# Altium PCB E73-2G4M04S_breakout_pcb.PcbDoc
Units mm, origin at the board's own origin, x right, y up, seen from the top; angles counter-clockwise.
Board outline 46.99 x 44.96 mm, 2 copper layers (Top Layer, Bottom Layer); 16 components, 40 nets, 138 pads, 11 vias.
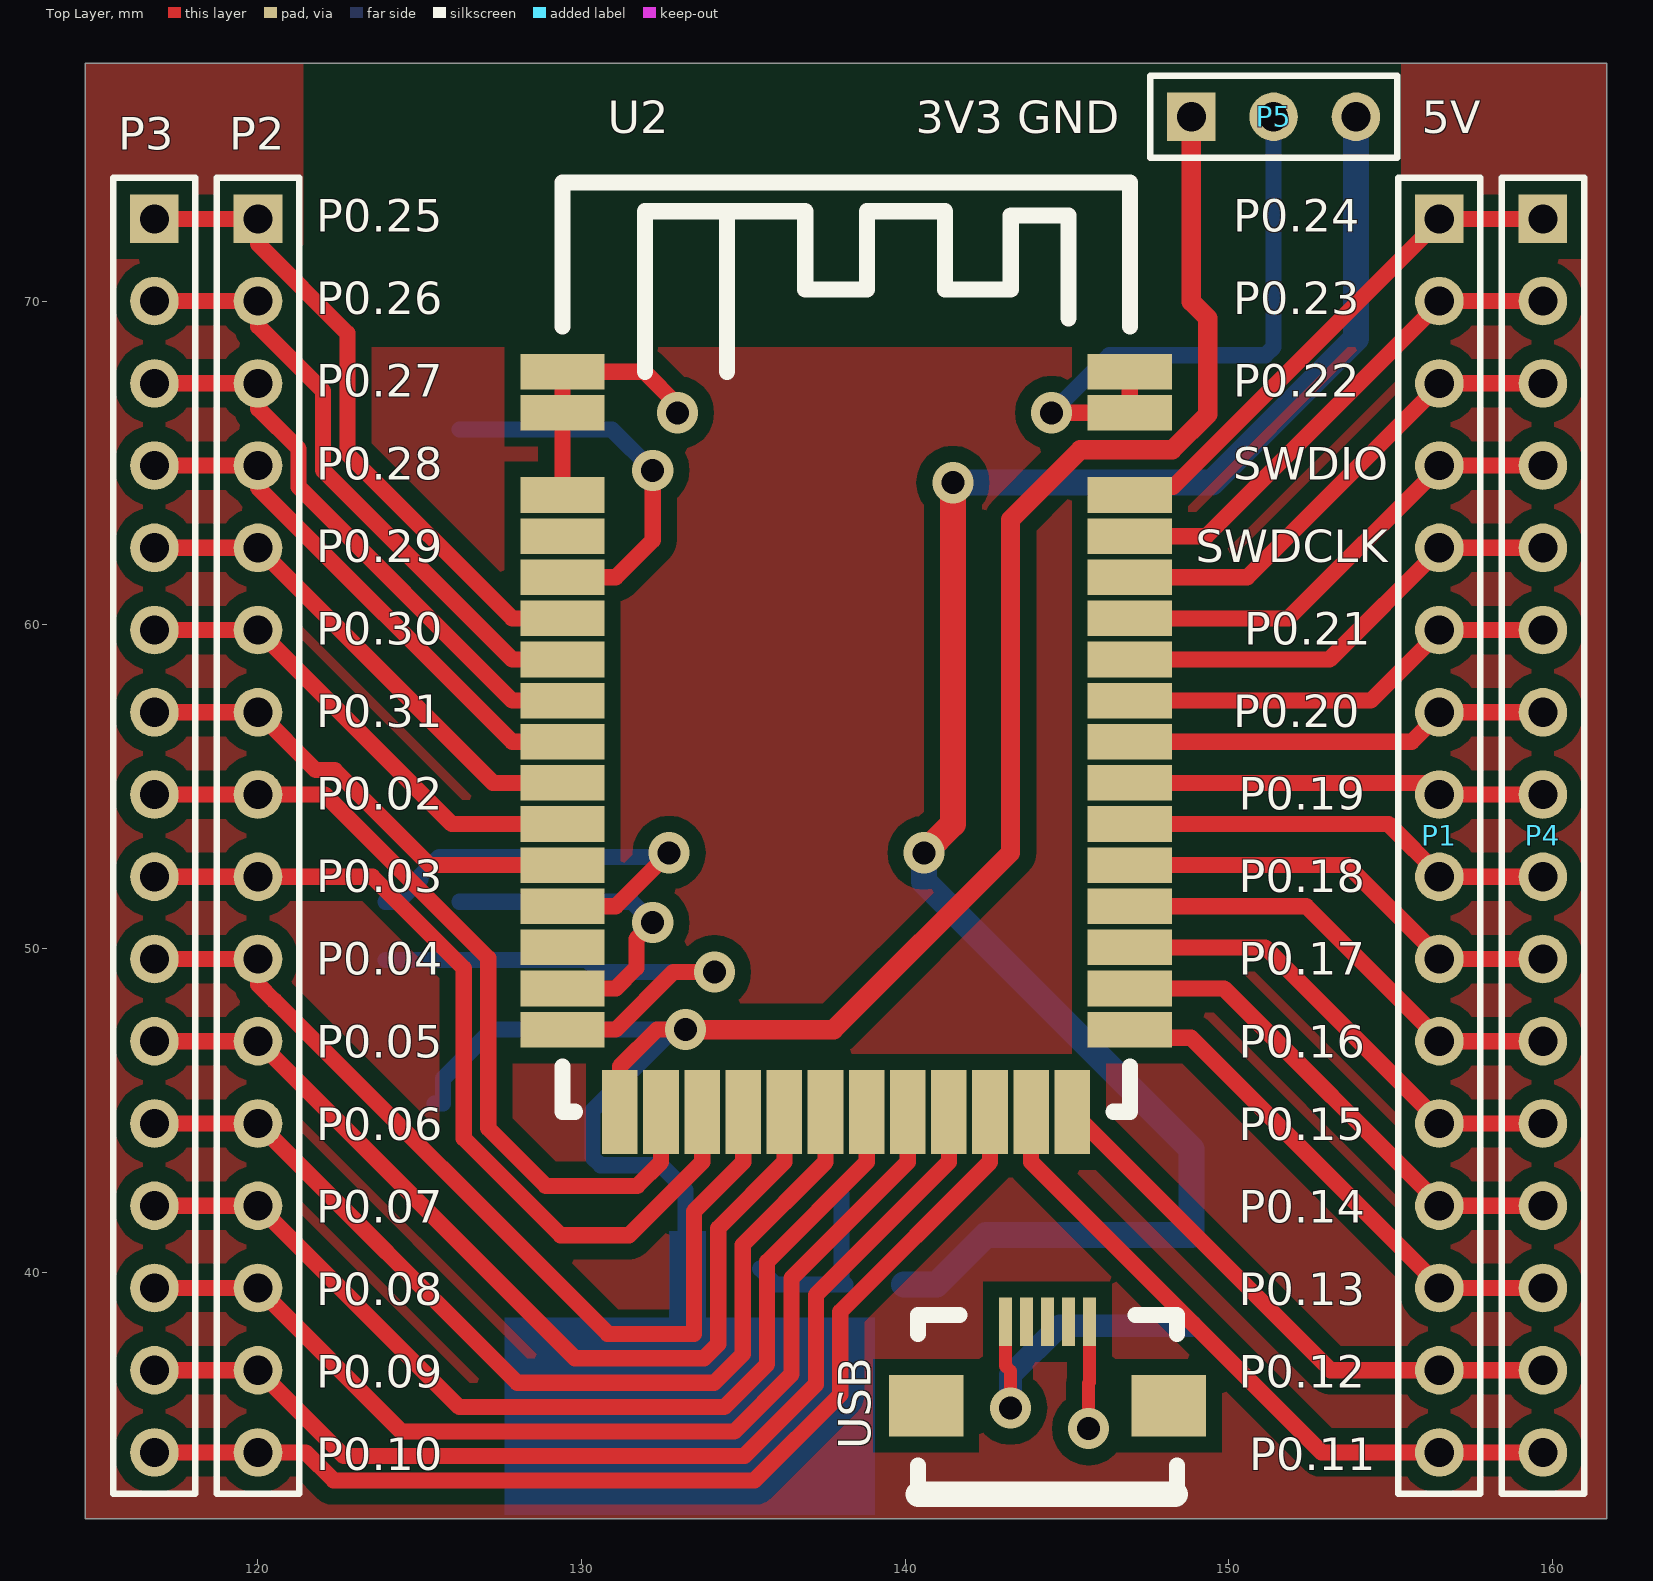
[diagram p0: Top Layer view]
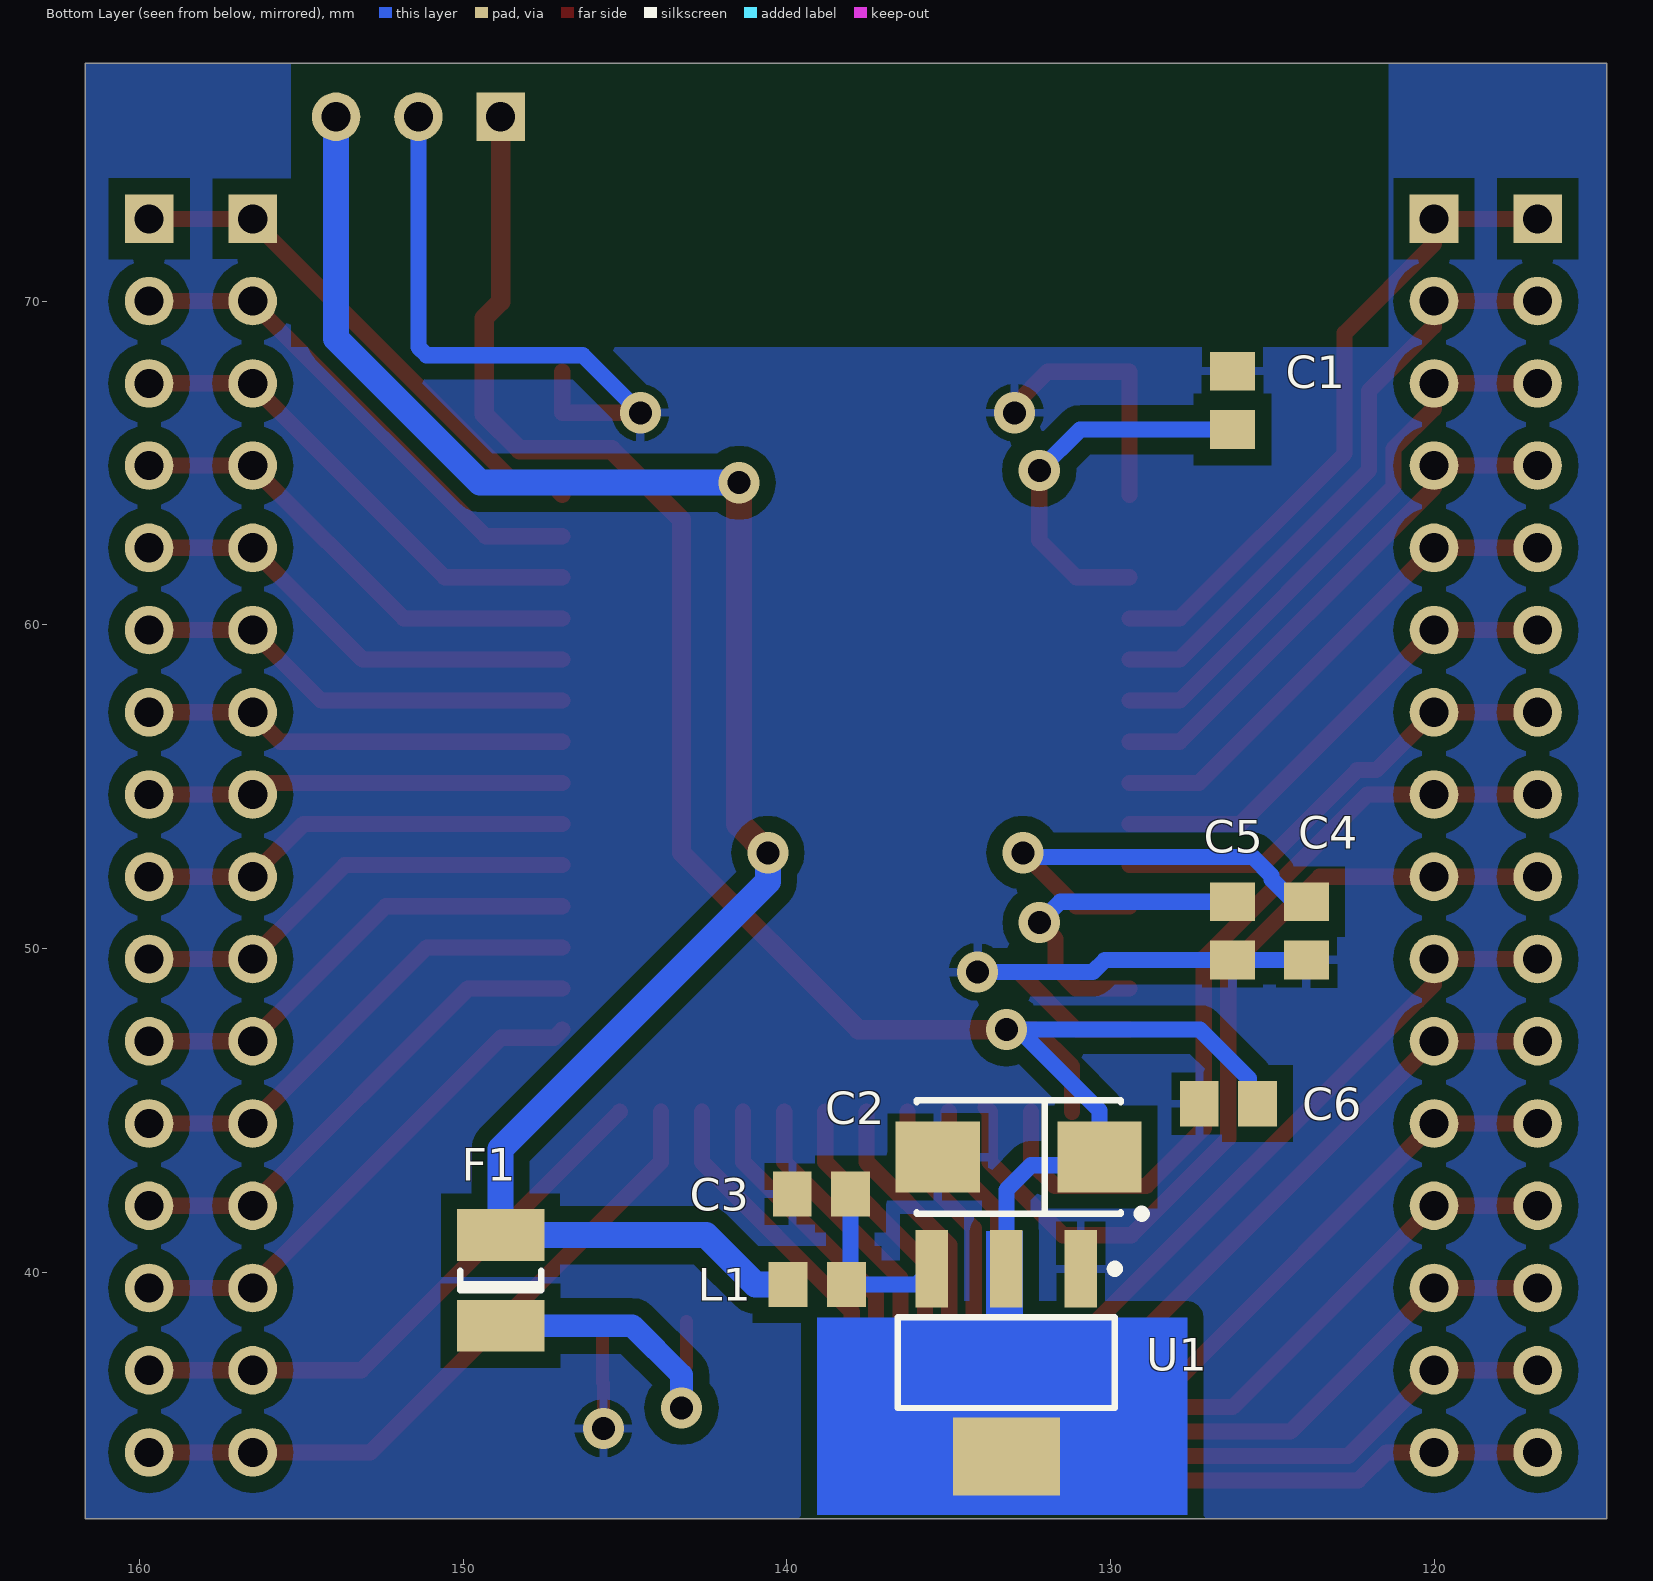
[diagram p1: Bottom Layer view, seen from below]

## Layer stack, top to bottom
Top Solder: solder mask 0.0102, Solder Resist, Dk 3.5
Top Layer: signal copper 0.0356
Dielectric 1: dielectric 0.32, FR-4, Dk 4.8
Bottom Layer: signal copper 0.0356
Bottom Solder: solder mask 0.0102, Solder Resist, Dk 3.5

## Board outline
114.681,32.385 114.681,77.343 161.671,77.343 161.671,32.385

## Design rules (kind name [scope] priority, off if disabled: settings)
Clearance "Poly Clearance" [InPolygon] p1: gap=0.5
Clearance [All] p2: gap=0.127
PolygonConnect [All] p1: connectstyle=Relief reliefconductorwidth=0.254 reliefentries=4 polygonreliefangle="90 Angle" airgapwidth=0.254
RoutingVias [All] p1: holewidth=0.711 width=1.27 viastyle="Through Hole" minholewidth=0.711 minwidth=1.27 maxholewidth=0.711 maxwidth=1.27
SilkToSolderMaskClearance [IsPad] p1: minsilkscreentomaskgap=0.127 clearancetoexposedcopper=TRUE
SolderMaskExpansion [All] p1: expansion=0.102
Width [All] p1: maxlimit=1 minlimit=0.254 preferedwidth=0.5 minimp=50.000000 maximp=50.000000 favimp=50.000000
29 further rules are at their usual default settings.

## Classes and differential pairs
component class E73-2G4M04S_breakout_sch: C1 C2 C3 C4 C5 C6 F1 L1 P1 P2 P3 P4 U1 U2 USB

## Components (designator, comment, footprint, x,y, rotation, side; value= is the part's Value field where it differs from the comment)
C1 "Cap" 6-0805_N 126.238,66.929 r270 bottom
C2 "TCSCN1C106KCAR" C 132.842,43.561 r0 bottom
C3 "Cap" 6-0805_N 138.938,42.418 r180 bottom
C4 "Cap" 6-0805_N 123.952,50.546 r270 bottom
C5 "Cap" 6-0805_N 126.238,50.546 r270 bottom
C6 "Cap" 6-0805_N 126.365,45.212 r0 bottom
F1 "PTC Fuse" 1210 148.844,39.751 r90 bottom
L1 "Ferrite" 6-0805_n 139.065,39.624 r180 bottom
P1 "Header 16" HDR1X16 156.5,72.538 r270 top
P2 "Header 16" HDR1X16 120.015,72.538 r270 top
P3 "Header 16" HDR1X16 116.815,72.538 r270 top
P4 "Header 16" HDR1X16 159.7,72.538 r270 top
P5 "Header 3" HDR1X3 148.844,75.692 r0 top
U1 "LM1117MPX-3.3" MP04A_N 133.223,37.211 r270 bottom
U2 "E73-2G4M04S" E73-2G4M04S 129.424,44.958 r0 top
USB "Micro-B" USB_2_MICRO_B 144.399,38.481 r180 top

## Footprints (in the part's own frame and the unit in brackets; to place one, negate y for a bottom-side part, rotate by r counter-clockwise, add the part's x,y. Pads: shape width x height; smd on the part's side, far side on the other; paste and mask are expansions set on the pad)
6-0805_N [mm] "Chip Resistor, Body 2.0x1.2mm, IPC Medium Density"
  rect 1.2x1.4 smd: 1(-0.9,0) 2(0.9,0)
  body extent -1.07,-0.7 1.07,0.7, height 0.7
6-0805_n [mm] "Chip Resistor, Body 2.0x1.2mm, IPC Medium Density"
  rect 1.2x1.4 smd: 1(-0.9,0) 2(0.9,0)
  body extent -1.07,-0.7 1.07,0.7, height 0.7
1210 [mm] "Chip Capacitor; Body 3.2 x 2.5 mm (LxW typ)"
  rect 1.6x2.7 smd: 1(-1.4,0) 2(1.4,0)
  silkscreen extent -0.3,-1.25 0.3,1.25
C [mm] "Capacitor, SM Tantalum; Body 6.0 x 3.2 mm (LxW typ)"
  rect 2.6x2.2 smd: 1(-2.5,0) 2(2.5,0)
  silkscreen extent -3.92,-1.75 3.15,1.87
E73-2G4M04S [mm] "nRF52832 2.4GHz Transceiver Wireless RF module"
  rect 2.6x1.1 smd: 0(-0.008,22.86) 1(-0.008,21.59) 2(-0.008,19.05) 3(-0.008,17.78) 4(-0.008,16.51) 5(-0.008,15.24) 6(-0.008,13.97) 7(-0.008,12.7) 8(-0.008,11.43) 9(-0.008,10.16) 10(-0.008,8.89) 11(-0.008,7.62) 12(-0.008,6.35) 13(-0.008,5.08) 14(-0.008,3.81) 15(-0.008,2.54) 28(17.518,2.54) 29(17.518,3.81) 30(17.518,5.08) 31(17.518,6.35) 32(17.518,7.62) 33(17.518,8.89) 34(17.518,10.16) 35(17.518,11.43) 36(17.518,12.7) 37(17.518,13.97) 38(17.518,15.24) 39(17.518,16.51) 40(17.518,17.78) 41(17.518,19.05) 42(17.518,21.59) 43(17.518,22.86)
  rect 1.1x2.6 smd: 16(1.77,0) 17(3.04,0) 18(4.31,0) 19(5.58,0) 20(6.85,0) 21(8.12,0) 22(9.39,0) 23(10.66,0) 24(11.93,0) 25(13.2,0) 26(14.47,0) 27(15.74,0)
  silkscreen extent 0,0 17.53,28.7
HDR1X3 [mm] "Connector; Header; 3 Position"
  rect 1.5x1.5 hole 0.9: 1(0,0)
  round 1.5 hole 0.9: 2(2.54,0) 3(5.08,0)
  silkscreen extent -1.27,-1.27 6.35,1.27
HDR1X16 [mm] "Connector; Header; 16 Position"
  rect 1.5x1.5 hole 0.9: 1(0,0)
  round 1.5 hole 0.9: 2(2.54,0) 3(5.08,0) 4(7.62,0) 5(10.16,0) 6(12.7,0) 7(15.24,0) 8(17.78,0) 9(20.32,0) 10(22.86,0) 11(25.4,0) 12(27.94,0) 13(30.48,0) 14(33.02,0) 15(35.56,0) 16(38.1,0)
  silkscreen extent -1.27,-1.27 39.37,1.27
MP04A_N [mm] "SOT223, 4-Leads, Body 6.5x3.5mm, Pitch 2.3mm, Lead Span 7mm, IPC Medium Density"
  rect 2.4x1 smd: 1(-2.9,2.3) 2(-2.9,0) 3(-2.9,-2.3)
  rect 2.4x3.3 smd: 4(2.9,0)
  silkscreen extent -3.02,-3.35 1.4,3.47, body extent -1.86,-3.35 1.86,3.35, height 1.8
USB_2_MICRO_B [mm] "Generic usb Micro-B connector footprint"
  rect 0.4x1.5 smd: 1(1.3,0) 2(0.65,0) 3(0,0) 4(-0.65,0) 5(-1.3,0)
  rect 2.3x1.9 smd: 6(-3.75,2.6) 7(3.75,2.6)
  silkscreen extent -4,-0.2 4,5.35

## Part data
C1 C3 C4 C5 C6: "Capacitor"
C2: library part "Cap Pol3", "Polarized Capacitor (Surface Mount)"
F1: library part "Fuse 1", "Fuse"
L1: library part Inductor, "Inductor"
P1 P2 P3 P4: "Header, 16-Pin"
P5: "Header, 3-Pin"
U1: "800mA Low-Dropout Linear Regulator, 4-pin SOT-223"
U2: "nRF52832 2.4GHz Transceiver Wireless rf Module"
USB: library part USB_MICRO_B, "Generic USB Micro-B connector SMT"

## Via types
v1: diameter 1.27, hole 0.711, Top Layer to Bottom Layer, 11 vias

## Nets (pads, with @x,y where several pads share a name; then routed paths per layer and width w, separated by ;. In a path a pad name is that pad's centre, name@x,y a point inside that pad or via, vN(x,y) a via of type N, cw(c..) or ccw(c..) an arc to the next point about the centre after c; other vN are vias at no path point)
3V3: C2.1 C6.1 P5.1 U1.2 U1.4 U2.16 | length 62.2
  Top Layer w0.5: U2.16 131.194,46.358 132.334,47.498 v1(133.223,47.498)
  Top Layer w0.6: v1(133.223,47.498) 137.795,47.498 143.256,52.959 143.256,63.246 145.415,65.405 148.253,65.405 149.352,66.504 149.352,69.469 148.844,69.977 P5.1
  Bottom Layer w0.5: C6.1 125.73,45.212 125.73,45.985 127.243,47.498 v1@132.588,47.498 ; 132.588,47.244 130.342,44.998 C2.1 130.596,43.307 132.461,43.307 133.223,42.545 U1.2
5V: F1.2 L1.1 P5.3 | length 57.7
  Top Layer w0.8: v1(140.589,52.959) 141.478,53.848 v1(141.478,64.389)
  Bottom Layer w0.8: L1.1 140.97,39.624 142.497,41.151 F1.2 148.844,43.815 140.589,52.07 v1(140.589,52.959) ; v1(141.478,64.389) 149.479,64.389 153.924,68.834 P5.3
GND: C1.1 C2.2 C3.1 C4.2 C5.2 C6.2 P5.2 U1.1 U2.0 U2.1 U2.2 U2.15 U2.42 U2.43 USB.5 | length 45.6
  Top Layer w0.4: v1(145.669,35.179) 145.669,36.576 145.699,36.606 USB.5
  Top Layer w0.5: U2.15 131.064,47.498 132.842,49.276 v1(134.112,49.276) ; U2.2 U2.1 U2.0 131.953,67.818 132.969,66.802 v1(132.969,66.548) ; v1(144.526,66.548) U2.42 U2.43
  Bottom Layer w0.5: C4.2 C5.2 130.186,49.646 130.556,49.276 v1(134.112,49.276) ; v1(144.526,66.548) 146.304,68.326 151.13,68.326 151.384,68.58 P5.2
NetC1_2: C1.2 U2.4 | length 11.9
  Top Layer w0.5: U2.4 131.064,61.468 132.207,62.611 v1(132.207,64.77)
  Bottom Layer w0.5: C1.2 130.948,66.029 v1(132.207,64.77)
NetC3_2: C3.2 L1.2 U1.3 | length 5.7
  Bottom Layer w0.5: U1.3 136.01,39.624 L1.2 138.038,39.751 C3.2
NetC4_1: C4.1 U2.12 | length 13.4
  Top Layer w0.5: U2.12 131.064,51.308 v1(132.715,52.959)
  Bottom Layer w0.5: C4.1 124.344,51.446 125.034,52.136 125.034,52.255 125.611,52.832 132.588,52.832 v1(132.715,52.959)
NetC5_1: C5.1 U2.14 | length 10.4
  Top Layer w0.5: U2.14 131.068,48.768 131.703,49.403 131.703,50.296 v1(132.207,50.8)
  Bottom Layer w0.5: C5.1 131.561,51.446 v1(132.207,50.8)
NetF1_1: F1.1 USB.1 | length 10
  Top Layer w0.4: USB.1 143.099,37.114 143.256,36.957 v1(143.256,35.814)
  Bottom Layer w0.7: v1(143.256,35.814) 143.256,36.83 144.777,38.351 F1.1
P0.02: P2.8 P3.8 U2.17 | length 25.6
  Top Layer w0.5: P3.8 P2.8 122.076,54.758 127.127,49.707 127.127,44.45 128.905,42.672 131.728,42.672 132.464,43.408 U2.17
P0.03: P2.9 P3.9 U2.18 | length 27.2
  Top Layer w0.5: P3.9 P2.9 123.55,52.218 126.373,49.395 126.373,44.138 129.363,41.148 131.474,41.148 133.734,43.408 U2.18 ; U2.18@133.731,44.961 U2.18@133.858,45.088
P0.04: P2.10 P3.10 U2.19 | length 29.4
  Top Layer w0.5: P3.10 P2.10 120.015,48.895 120.518,48.392 120.534,48.392 130.81,38.116 130.81,38.1 133.477,38.1 133.477,41.881 135.004,43.408 U2.19
P0.05: P2.11 P3.11 U2.20 | length 29.7
  Top Layer w0.5: P3.11 P2.11 129.807,37.346 133.789,37.346 134.231,37.788 134.231,41.365 136.274,43.408 U2.20
P0.06: P2.12 P3.12 U2.21 | length 30.4
  Top Layer w0.5: P3.12 P2.12 128.021,36.592 134.102,36.592 134.985,37.475 134.985,40.849 137.544,43.408 U2.21
P0.07: P2.13 P3.13 U2.22 | length 31.1
  Top Layer w0.5: P3.13 P2.13 126.235,35.838 134.414,35.838 135.739,37.163 135.739,40.333 138.814,43.408 U2.22
P0.08: P2.14 P3.14 U2.23 | length 31.8
  Top Layer w0.5: P3.14 P2.14 124.449,35.084 134.726,35.084 136.493,36.851 136.493,39.817 140.084,43.408 U2.23
P0.09: P2.15 P3.15 U2.24 | length 32.6
  Top Layer w0.5: P3.15 P2.15 122.663,34.33 135.039,34.33 137.247,36.538 137.247,39.301 141.354,43.408 U2.24
P0.10: P2.16 P3.16 U2.25 | length 33.3
  Top Layer w0.5: P3.16 P2.16 121.489,34.438 122.351,33.576 135.351,33.576 138.001,36.226 138.001,38.785 142.624,43.408 U2.25
P0.11: P1.16 P4.16 U2.26 | length 21.1
  Top Layer w0.5: U2.26 143.894,43.408 152.864,34.438 P1.16 156.56,34.438 P4.16
P0.12: P1.15 P4.15 U2.27 | length 17.8
  Top Layer w0.5: U2.27 153.144,36.978 P1.15 156.56,36.978 P4.15
P0.13: P1.14 P4.14 U2.28 | length 16.1
  Top Layer w0.5: U2.28 147.192,47.248 148.83,47.248 156.56,39.518 P4.14
P0.14: P1.13 P4.13 U2.29 | length 15.5
  Top Layer w0.5: U2.29 149.85,48.768 156.56,42.058 P4.13
P0.15: P1.12 P4.12 U2.30 | length 15
  Top Layer w0.5: U2.30 151.12,50.038 156.56,44.598 P4.12
P0.16: P1.11 P4.11 U2.31 | length 14.5
  Top Layer w0.5: U2.31 152.39,51.308 156.56,47.138 P4.11
P0.17: P1.10 P4.10 U2.32 | length 14
  Top Layer w0.5: U2.32 153.66,52.578 156.56,49.678 P4.10
P0.18: P1.9 P4.9 U2.33 | length 13.4
  Top Layer w0.5: U2.33 154.93,53.848 156.56,52.218 P4.9
P0.19: P1.8 P4.8 U2.34 | length 12.9
  Top Layer w0.5: U2.34 156.2,55.118 156.56,54.758 P4.8
P0.20: P1.7 P4.7 U2.35 | length 13.1
  Top Layer w0.5: U2.35 155.65,56.388 156.56,57.298 P4.7
P0.21: P1.6 P4.6 U2.36 | length 13.7
  Top Layer w0.5: U2.36 154.38,57.658 156.56,59.838 P4.6
P0.22: P1.3 P4.3 U2.39 | length 15.2
  Top Layer w0.5: U2.39 150.57,61.468 156.56,67.458 P4.3
P0.23: P1.2 P4.2 U2.40 | length 15.8
  Top Layer w0.5: U2.40 149.3,62.738 156.56,69.998 P4.2
P0.24: P1.1 P4.1 U2.41 | length 16.3
  Top Layer w0.5: U2.41 147.192,64.258 148.28,64.258 156.56,72.538 P4.1
P0.25: P2.1 P3.1 U2.5 | length 20.3
  Top Layer w0.5: P3.1 P2.1 120.015,71.771 122.777,69.009 122.777,65.287 127.866,60.198 U2.5
P0.26: P2.2 P3.2 U2.6 | length 19.1
  Top Layer w0.5: P3.2 P2.2 120.015,69.215 120.031,69.215 122.023,67.223 122.023,64.771 127.866,58.928 U2.6
P0.27: P2.3 P3.3 U2.7 | length 17.8
  Top Layer w0.5: P3.3 P2.3 120.015,66.675 120.031,66.675 121.269,65.437 121.269,64.255 127.866,57.658 U2.7
P0.28: P2.4 P3.4 U2.8 | length 16.5
  Top Layer w0.5: P3.4 P2.4 120.015,64.239 127.866,56.388 U2.8
P0.29: P2.5 P3.5 U2.9 | length 15.6
  Top Layer w0.5: P3.5 P2.5 127.275,55.118 U2.9
P0.30: P2.6 P3.6 U2.10 | length 15.1
  Top Layer w0.5: P3.6 P2.6 126.005,53.848 U2.10
P0.31: P2.7 P3.7 U2.11 | length 14.6
  Top Layer w0.5: P3.7 P2.7 121.801,55.512 122.389,55.512 125.323,52.578 U2.11
SWDCLK: P1.5 P4.5 U2.37 | length 14.2
  Top Layer w0.5: U2.37 153.11,58.928 156.56,62.378 P4.5
SWDIO: P1.4 P4.4 U2.38 | length 14.7
  Top Layer w0.5: U2.38 151.84,60.198 156.56,64.918 P4.4
pads on no net: U2.3 U2.13 USB.2 USB.3 USB.4 USB.6 USB.7

## Polygon pours and split planes (outlines as drawn)
GND on Bottom Layer "GroundPour" (solid, pour order 0): 114.681,77.343 114.681,32.385 161.671,32.385 161.671,77.343 155.321,77.343 155.321,73.66 155.321,68.58 138.43,68.58 121.412,68.58 121.285,68.453 121.412,68.58 121.412,73.787 121.412,77.343
no net on Top Layer "NONET_L01_P002" (solid, pour order 2): 114.681,77.343 114.681,32.385 161.671,32.385 161.671,77.343 155.321,77.343 155.321,73.66 155.321,68.58 138.43,68.58 121.412,68.58 121.285,68.453 121.412,68.58 121.412,73.787 121.412,77.343

## Other copper
Bottom Layer:
  rectangle net 3V3: 132.715,35.052 133.858,41.275
  rectangle net 3V3: 127.635,32.512 139.065,38.608

## Silkscreen, mask and mechanical layers (free items; w line width, h text height)
Top Overlay:
  text "3V3 GND" at 140.335,75.184 h1
  text "5V" at 155.956,75.184 h1
  text "P0.25" at 121.82,72.136 h1
  text "P0.24" at 150.137,72.136 h1
  text "P0.26" at 121.82,69.586 h1
  text "P0.23" at 150.137,69.586 h1
  text "P0.27" at 121.82,67.036 h1
  text "P0.22" at 150.137,67.036 h1
  text "P0.28" at 121.82,64.486 h1
  text "SWDIO" at 150.137,64.486 h1
  text "P0.29" at 121.82,61.936 h1
  text "SWDCLK" at 148.971,61.936 h1
  text "P0.30" at 121.82,59.386 h1
  text "P0.21" at 150.471,59.386 h1
  text "P0.31" at 121.82,56.836 h1
  text "P0.20" at 150.137,56.836 h1
  text "P0.02" at 121.82,54.286 h1
  text "P0.19" at 150.304,54.286 h1
  text "P0.03" at 121.82,51.736 h1
  text "P0.18" at 150.304,51.736 h1
  text "P0.04" at 121.82,49.186 h1
  text "P0.17" at 150.304,49.186 h1
  text "P0.05" at 121.82,46.636 h1
  text "P0.16" at 150.304,46.636 h1
  text "P0.06" at 121.82,44.086 h1
  text "P0.15" at 150.304,44.086 h1
  text "P0.07" at 121.82,41.536 h1
  text "P0.14" at 150.304,41.536 h1
  text "P0.08" at 121.82,38.986 h1
  text "P0.13" at 150.304,38.986 h1
  text "P0.09" at 121.82,36.436 h1
  text "P0.12" at 150.304,36.436 h1
  text "P0.10" at 121.82,33.886 h1
  text "P0.11" at 150.637,33.886 h1
Top Solder:
  rectangle: 142.748,37.592 146.05,39.37
Mechanical 1:
  the board outline again, w0.5